# Altium PCB PW_TPS6213x_TestDemo.PcbDoc
Units mil, origin at the board's own origin, x right, y up, seen from the top; angles counter-clockwise.
Board outline 1968.5 x 1968.5 mil, 2 copper layers (Top Layer, Bottom Layer); 52 components, 24 nets, 157 pads, 297 vias.
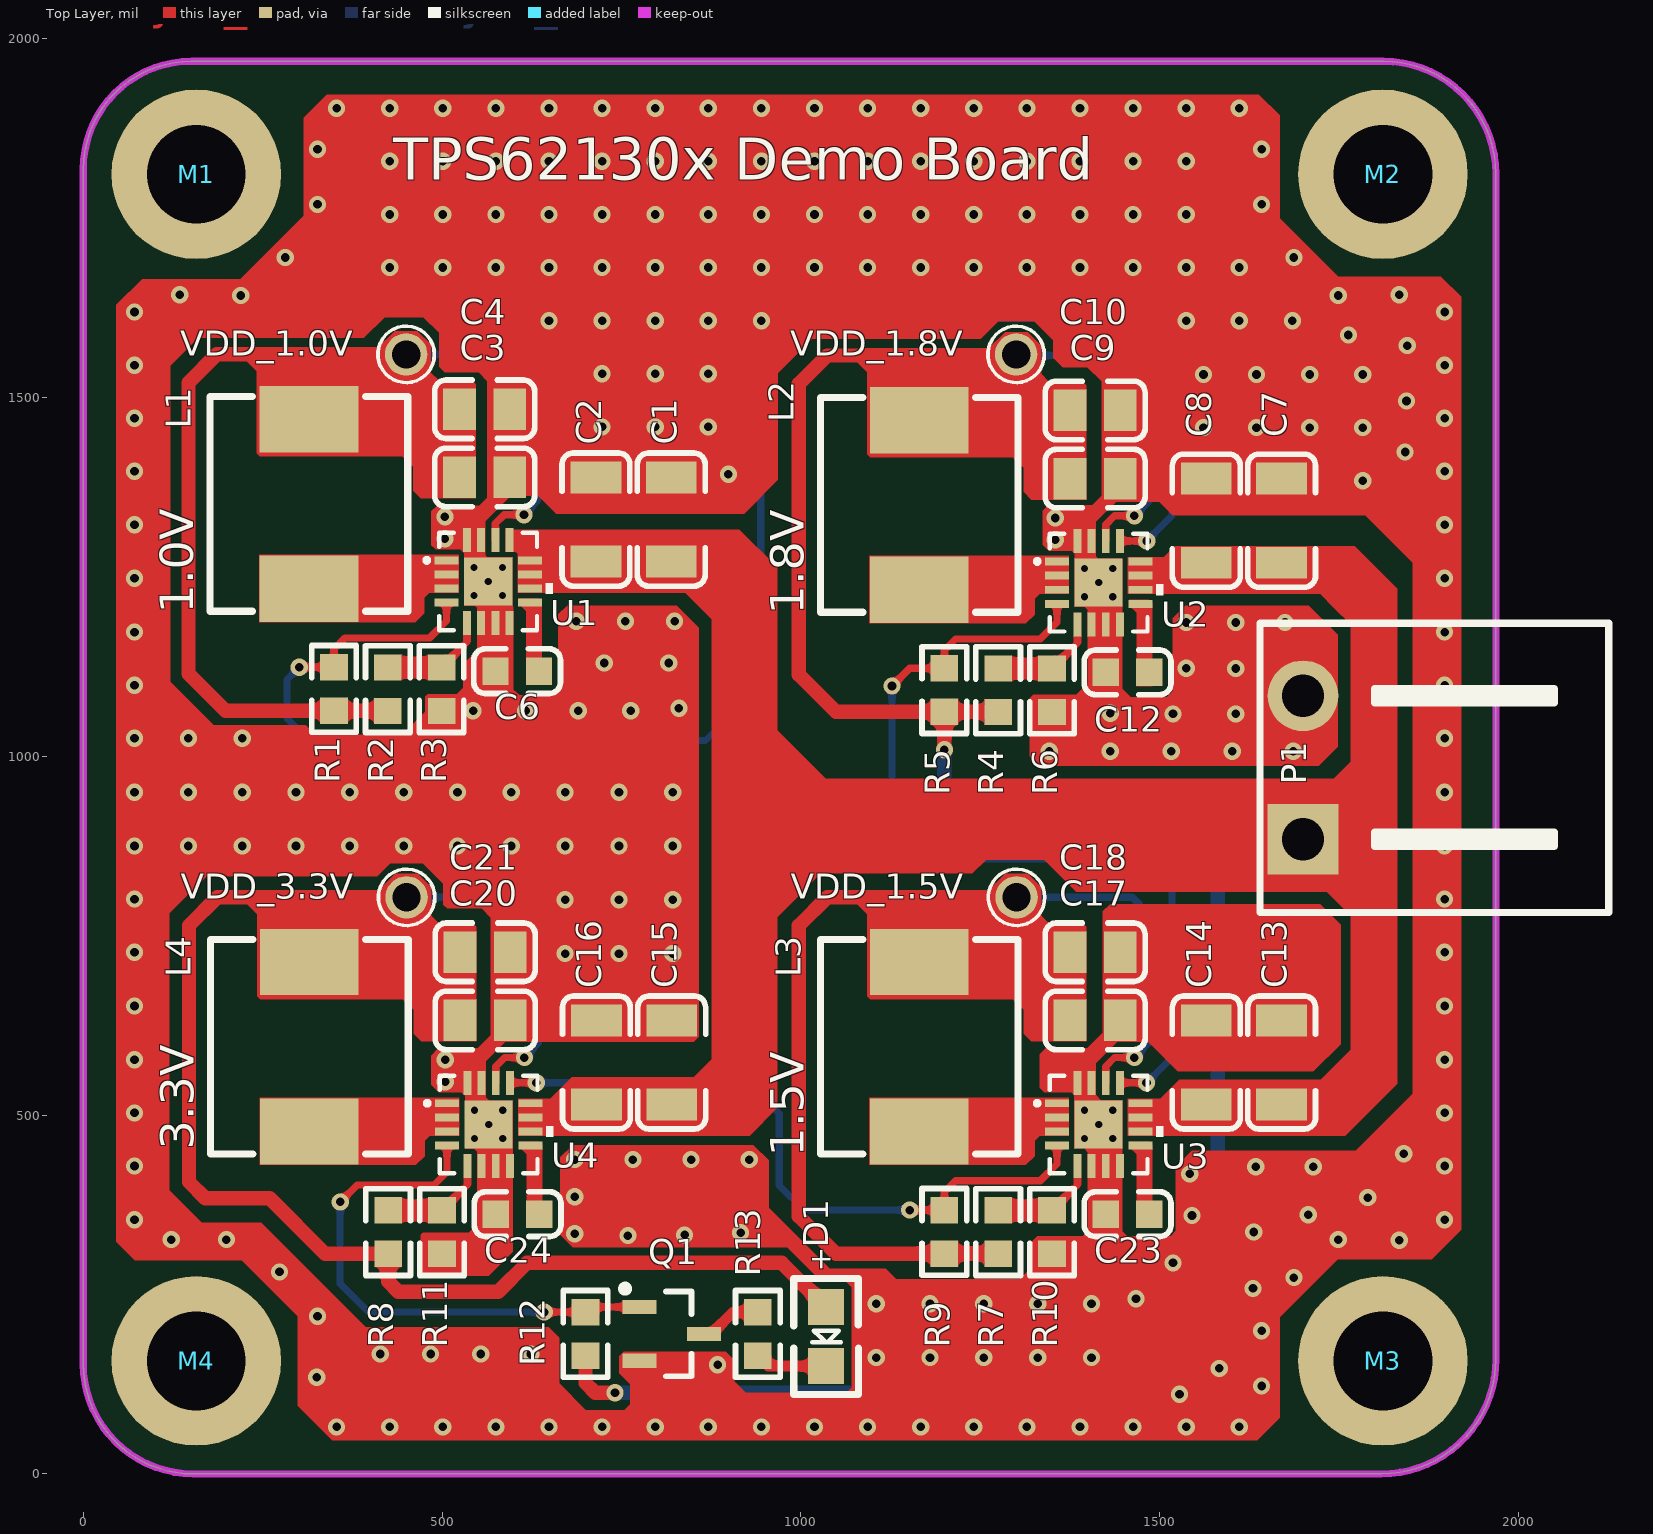
[diagram p0: Top Layer view]
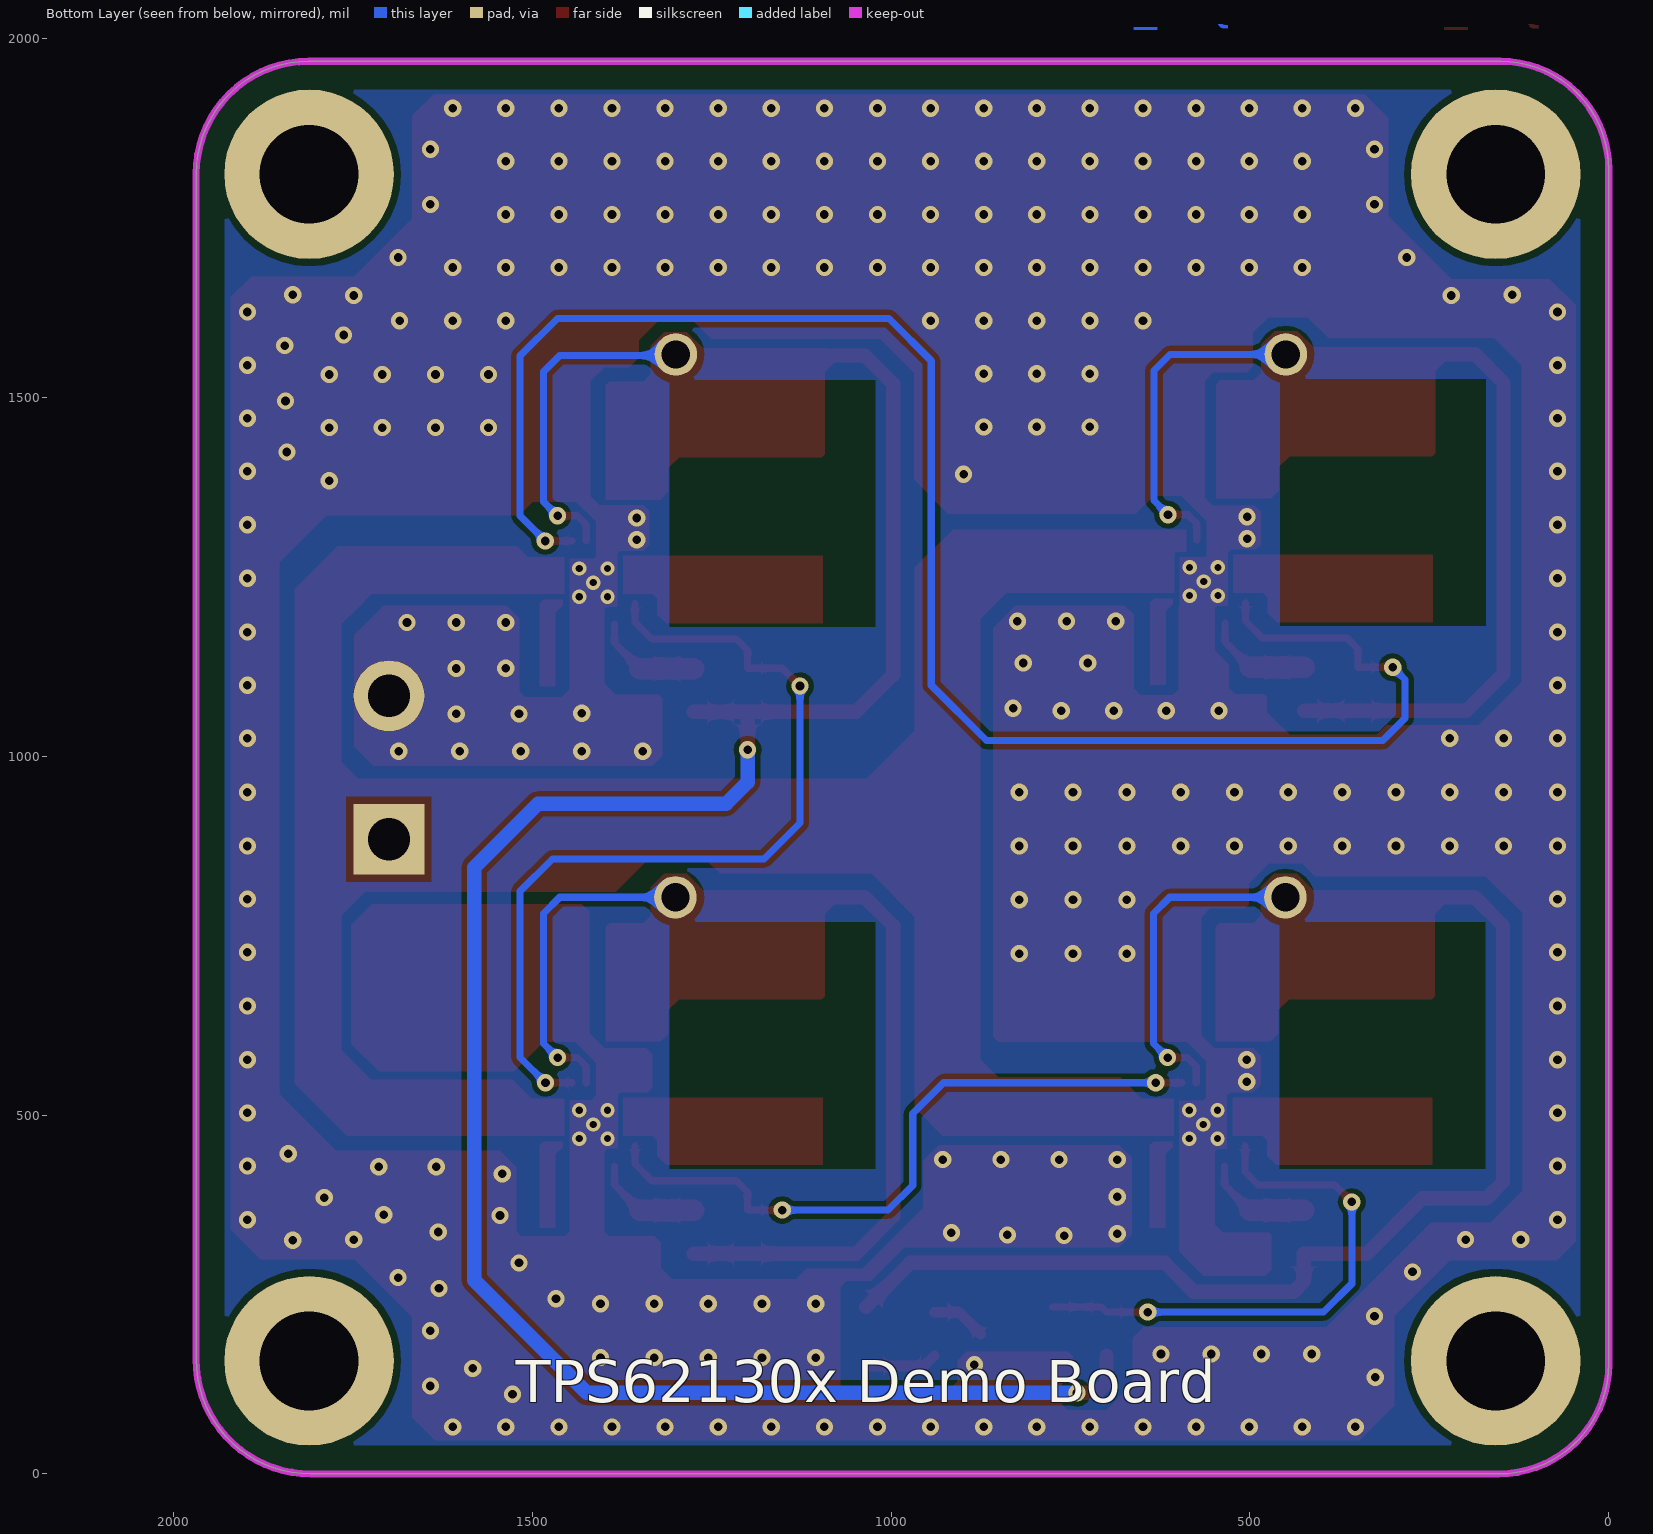
[diagram p1: Bottom Layer view, seen from below]

## Layer stack, top to bottom
Top Solder: solder mask 0.4, Solder Resist, Dk 3.5
Top Layer: signal copper 1.4
Dielectric 1: dielectric 12.6, FR-4, Dk 4.8
Bottom Layer: signal copper 1.4
Bottom Solder: solder mask 0.4, Solder Resist, Dk 3.5

## Board outline
0,153.25 0,1817.71 cw(c150.8,1817.71) 150.8,1968.5 1811.53,1968.5 cw(c1811.53,1811.53) 1968.5,1811.53 1968.5,159.57 cw(c1808.93,159.57) 1808.93,0 153.25,0 cw(c153.25,153.25)

## Design rules (kind name [scope] priority, off if disabled: settings)
BoardOutlineClearance [InNet('GND')] p1: gap=39.37 ignorepadtopadclearanceinfootprint=FALSE
Clearance [All] p1: gap=10 ignorepadtopadclearanceinfootprint=TRUE except(0: Arc-Hole Track-Hole SMDPad-Hole THPad-Hole Via-Hole Fill-Hole Poly-Hole Region-Hole Text-Hole; 6: SMDPad-Fill SMDPad-Poly SMDPad-Region; 7: Arc-SMDPad Track-SMDPad Track-Poly Track-Region Via-Poly Via-Region Poly-Poly Poly-Region Region-Region)
HoleSize [All] p1: absolutevalues=TRUE maxlimit=1000 minlimit=1 maxpercent=80.000 minpercent=20.000
MinimumSolderMaskSliver [All] p1: minsoldermaskwidth=1
PlaneConnect [All] p1: planeconnectstyle=Direct reliefexpansion=20 reliefentries=4 reliefconductorwidth=10 reliefairgap=10
PolygonConnect [InNet('No Net')] p1: connectstyle=Direct reliefconductorwidth=10 reliefentries=4 polygonreliefangle="90 Angle" airgapwidth=10
RoutingVias [All] p1: holewidth=12 width=24 viastyle="Through Hole" minholewidth=10 minwidth=20 maxholewidth=28 maxwidth=50
SilkToSilkClearance [All] p1: silktosilkclearance=0
SilkToSolderMaskClearance [IsPad] p1: minsilkscreentomaskgap=1 clearancetoexposedcopper=TRUE
SolderMaskExpansion [All] p1: expansion=4 istentingtop=FALSE
UnRoutedNet [All] p1: checkbadconnections=TRUE
Width [All] p1: maxlimit=500 minlimit=6 preferedwidth=10
24 further rules are at their usual default settings.

## Classes and differential pairs
component class "Room Definition 2": C7 C8 C9 C10 C12 L2 M6 R4 R5 R6 U2
component class "Room Definition 1": C1 C2 C3 C4 C6 L1 M5 R1 R2 R3 U1

## Components (designator, comment, footprint, x,y, rotation, side; value= is the part's Value field where it differs from the comment)
C1 "C_B2_10uF_50V_C1206_20%" C1206 819.37,1329.84 r270 top value=10uF/50V
C2 "C_B2_10uF_50V_C1206_20%" C1206 714.37,1329.84 r270 top value=10uF/50V
C3 "C_B2_22uF_10V_C0805_20%" C0805 559.37,1388.5 r180 top value=22uF/10V
C4 "C_B2_22uF_10V_C0805_20%" C0805 559.37,1483.5 r180 top value=22uF/10V
C6 "C_B2_3.3nF_50V_C0603_10%" C0603 604.69,1118.5 r0 top value=3.3nF/50V
C7 "C_B2_10uF_50V_C1206_20%" C1206 1670,1328.27 r270 top value=10uF/50V
C8 "C_B2_10uF_50V_C1206_20%" C1206 1565,1328.27 r270 top value=10uF/50V
C9 "C_B2_22uF_10V_C0805_20%" C0805 1410,1386.93 r180 top value=22uF/10V
C10 "C_B2_22uF_10V_C0805_20%" C0805 1410,1481.93 r180 top value=22uF/10V
C12 "C_B2_3.3nF_50V_C0603_10%" C0603 1455.32,1116.93 r0 top value=3.3nF/50V
C13 "C_B2_10uF_50V_C1206_20%" C1206 1670,573.27 r270 top value=10uF/50V
C14 "C_B2_10uF_50V_C1206_20%" C1206 1565,573.27 r270 top value=10uF/50V
C15 "C_B2_10uF_50V_C1206_20%" C1206 820,573.27 r270 top value=10uF/50V
C16 "C_B2_10uF_50V_C1206_20%" C1206 715,573.27 r270 top value=10uF/50V
C17 "C_B2_22uF_10V_C0805_20%" C0805 1410,631.93 r180 top value=22uF/10V
C18 "C_B2_22uF_10V_C0805_20%" C0805 1410,726.93 r180 top value=22uF/10V
C20 "C_B2_22uF_10V_C0805_20%" C0805 560,631.93 r180 top value=22uF/10V
C21 "C_B2_22uF_10V_C0805_20%" C0805 560,726.93 r180 top value=22uF/10V
C23 "C_B2_3.3nF_50V_C0603_10%" C0603 1455.32,361.93 r0 top value=3.3nF/50V
C24 "C_B2_3.3nF_50V_C0603_10%" C0603 605.32,361.93 r0 top value=3.3nF/50V
D1 "D_D2_LED-BLUE_LED0805" LED0805 1035,232.48 r270 top value=BLUE
L1 "L_C2_2.2uH_10A_MWSA0603S_20%_(MWSA0603S-2R2MT)" L_MWSA0603S 314.37,1351.77 r90 top value=2.2uH/10A
L2 "L_C2_2.2uH_10A_MWSA0603S_20%_(MWSA0603S-2R2MT)" L_MWSA0603S 1165,1350.2 r90 top value=2.2uH/10A
L3 "L_C2_2.2uH_10A_MWSA0603S_20%_(MWSA0603S-2R2MT)" L_MWSA0603S 1165,595.2 r90 top value=2.2uH/10A
L4 "L_C2_2.2uH_10A_MWSA0603S_20%_(MWSA0603S-2R2MT)" L_MWSA0603S 315,595.2 r90 top value=2.2uH/10A
M1 "M_HOLE-3.00mm" "M3 3.5x6mm" 157.48,1811.02 r0 top locked value=HOLE-3.00mm
M2 "M_HOLE-3.00mm" "M3 3.5x6mm" 1811.02,1811.02 r0 top locked value=HOLE-3.00mm
M3 "M_HOLE-3.00mm" "M3 3.5x6mm" 1811.02,157.48 r0 top value=HOLE-3.00mm
M4 "M_HOLE-3.00mm" "M3 3.5x6mm" 157.48,157.48 r0 top value=HOLE-3.00mm
P1 "P_EDG_1X2H_5.08_M" KF2EDGK5.08-2P_H 1699.8,884.25 r90 top value=EDG_1X2H_5.08_M
Q1 "Q_B2_SI2302_SOT23-3N" SOT23-3N 820,195.08 r270 top value=SI2302
R1 "R_B2_10K_1/10W_R0603_1%" R0603 349.37,1093.82 r270 top value=10K
R2 "R_B2_3K01_1/10W_R0603_1%" R0603 424.37,1093.5 r270 top value=3K01
R3 "R_B2_12K_1/10W_R0603_1%" R0603 499.37,1093.5 r90 top value=12K
R4 "R_B2_3K01_1/10W_R0603_1%" R0603 1275,1091.93 r270 top value=3K01
R5 "R_B2_10K_1/10W_R0603_1%" R0603 1200,1092.24 r270 top value=10K
R6 "R_B2_2K4_1/10W_R0603_1%" R0603 1350,1091.93 r90 top value=2K4
R7 "R_B2_2K4_1/10W_R0603_1%" R0603 1275,336.93 r270 top value=2K4
R8 "R_B2_7K5_1/10W_R0603_1%" R0603 425,336.93 r270 top value=7K5
R9 "R_B2_10K_1/10W_R0603_1%" R0603 1200,337.24 r270 top value=10K
R10 "R_B2_2K7_1/10W_R0603_1%" R0603 1350,336.93 r90 top value=2K7
R11 "R_B2_2K4_1/10W_R0603_1%" R0603 500,336.93 r90 top value=2K4
R12 "R_B2_10K_1/10W_R0603_1%" R0603 700,195.08 r90 top value=10K
R13 "R_B2_1K_1/10W_R0603_1%" R0603 940,195.08 r270 top value=1K
U1 "U_TPS62130RGTT_QFN16" QFN16-3X3-EP 564.37,1243.5 r0 top value=TPS62130RGTT
U2 "U_TPS62130RGTT_QFN16" QFN16-3X3-EP 1415,1241.93 r0 top value=TPS62130RGTT
U3 "U_TPS62130RGTT_QFN16" QFN16-3X3-EP 1415,486.93 r0 top value=TPS62130RGTT
U4 "U_TPS62130RGTT_QFN16" QFN16-3X3-EP 565,486.93 r0 top value=TPS62130RGTT
VDD_1.0V "M_TP_HOLE" TP-HOLE 450,1560 r90 top value=Testpoint (schematic designator M5)
VDD_1.5V "M_TP_HOLE" TP-HOLE 1300.63,803.43 r90 top value=Testpoint (schematic designator M7)
VDD_1.8V "M_TP_HOLE" TP-HOLE 1300,1560 r90 top value=Testpoint (schematic designator M6)
VDD_3.3V "M_TP_HOLE" TP-HOLE 450.63,803.43 r90 top value=Testpoint (schematic designator M8)

## Footprints (in the part's own frame and the unit in brackets; to place one, negate y for a bottom-side part, rotate by r counter-clockwise, add the part's x,y. Pads: shape width x height; smd on the part's side, far side on the other; paste and mask are expansions set on the pad)
C0603 [mm]
  rect 0.93x0.98 smd: 1(-0.77,0) 2(0.77,0)
  silkscreen extent -1.53,-0.79 1.54,0.79, body extent -0.8,-0.4 0.8,0.4, height 0.3
C0805 [mm]
  rect 1.16x1.47 smd: 1(-0.89,0) 2(0.89,0)
  silkscreen extent -1.77,-1.04 1.77,1.04, body extent -1,-0.62 1,0.63, height 0.77
C1206 [mm]
  rect 1.13x1.8 smd: 1(-1.49,0) 2(1.49,0)
  silkscreen extent -2.36,-1.2 2.35,1.2, body extent -1.6,-0.81 1.6,0.79, height 1
KF2EDGK5.08-2P_H [mm]
  rect 2.5x2.5 hole 1.5: 1(0,0)
  round 2.5 hole 1.5: 2(5.08,0)
  silkscreen extent -2.59,-10.82 7.65,1.52, body extent -2.54,-10.8 7.62,0.5, height 8.5
L_MWSA0603S [mm]
  rect 2.35x3.5 smd: 1(-3,0) 2(3,0)
  silkscreen extent -3.8,-3.5 3.8,3.5, body extent -3.6,-3.3 3.6,3.3, height 2.8
LED0805 [mil] "1/8W"
  rect 50x50 smd: 1(0,0) 2(82.3,0.2)
  silkscreen extent -40,-45 122,45, body extent 2,-25 80,25, height 20
"M3 3.5x6mm" [mm] "M3螺丝孔，孔3.5mm，焊盘6mm"
  round 6 hole 3.5: 0(0,0)
QFN16-3X3-EP [mm]
  rect 0.85x0.28 smd paste-0.01 mask+0.07: 1(-1.475,0.75) 2(-1.475,0.25) 3(-1.475,-0.25) 4(-1.475,-0.75) 9(1.475,-0.75) 10(1.475,-0.25) 11(1.475,0.25) 12(1.475,0.75)
  rect 0.28x0.85 smd paste-0.01 mask+0.07: 5(-0.75,-1.475) 6(-0.25,-1.475) 7(0.25,-1.475) 8(0.75,-1.475) 13(0.75,1.475) 14(0.25,1.475) 15(-0.25,1.475) 16(-0.75,1.475)
  rect 1.7x1.7 smd paste-0.01 mask+0.07: 17(0,0)
  silkscreen extent -2.24,-1.73 2.29,1.73, body extent -1.63,-1.63 1.63,1.63, height 1
R0603 [mm]
  rect 0.93x0.98 smd: 1(-0.77,0) 2(0.77,0)
  silkscreen extent -1.53,-0.79 1.54,0.79, body extent -0.85,-0.4 0.85,0.4, height 0.56
SOT23-3N [mm]
  rect 0.5x1.2 smd: 1(-0.95,-1.143) 2(0.95,-1.143) 3(0,1.143)
  silkscreen extent -1.72,-1.78 1.5,0.7, body extent -1.5,-1.2 1.5,1.2, height 1.05
TP-HOLE [mm]
  round 1.5 hole 1: 1(0,0)
  silkscreen extent -1,-1 1,1

## Part data
C3 C4 C9 C10 C17 C18 C20 C21: "X5R", ERP=01.02.02.037
P1: "Bend foot 5.08EDG", ERP=01.10.199C
Q1: "N-channel FET", ERP=01.05.01.173
U1 U2 U3 U4: "TPS6213x 3-V to17-V, 3-A Step-Down Converter In 3-mm × 3-mm QFN Package"
C1 C2 C7 C8 C13 C14 C15 C16: ERP=01.02.03.005
D1: ERP=01.09.002
L1 L2 L3 L4: ERP=01.03.050
M1 M2 M3 M4 VDD_1.0V VDD_1.5V VDD_1.8V VDD_3.3V: Note=NC
R1 R5 R9 R12: ERP=01.01.02.030
R2 R4: ERP=01.01.02.083
R3: ERP=01.01.02.081
R6 R7 R11: ERP=01.01.02.086
R8: ERP=01.01.02.085
R10: ERP=01.01.02.093
R13: ERP=01.01.02.040

## Via types
v1: diameter 24, hole 12, Top Layer to Bottom Layer, tented both sides, 277 vias
v2: diameter 20, hole 10, Top Layer to Bottom Layer, tented both sides, 20 vias

## Nets (pads, with @x,y where several pads share a name; then routed paths per layer and width w, separated by ;. In a path a pad name is that pad's centre, name@x,y a point inside that pad or via, vN(x,y) a via of type N, cw(c..) or ccw(c..) an arc to the next point about the centre after c; other vN are vias at no path point)
GND: C1.1 C2.1 C3.1 C4.1 C6.1 C7.1 C8.1 C9.1 C10.1 C12.1 C13.1 C14.1 C15.1 C16.1 C17.1 C18.1 C20.1 C21.1 C23.1 C24.1 P1.2 Q1.2 R3.1 R6.1 R10.1 R11.1 U1.6 U1.7 U1.8 U1.15 U1.16 U1.17 U2.6 U2.7 U2.8 U2.15 U2.16 U2.17 U3.6 U3.7 U3.8 U3.15 U3.16 U3.17 U4.6 U4.7 U4.8 U4.15 U4.16 U4.17
  other v1: 353,65.5 427,65.5 501,65.5 575,65.5 649,65.5 723,65.5 797,65.5 871,65.5 945,65.5 1019,65.5 1093,65.5 1167,65.5 1241,65.5 1315,65.5 1389,65.5 1463,65.5 1537,65.5 1611,65.5 1527.56,111 1642,122.5 325.5,134.5 1583,147 884,152 1105,162 1180,162 1255,162 1330,162 1405,162 414,167 484,167 554,167 624,167 1642,199.5 326.5,219.5 1105,237 1180,237 1255,237 1330,237 1405,237 1467,244 1630,258.5 1687,273.5 273.5,281.5 1518.5,294 1834,325.5 122.5,326.5 199.5,326.5 1749,326.5 759,332 838,333 685,334.5 916,336 1631,337 71.5,354 1897,354 1545,360 1707,361 1790,385 685,386.25 1542,418 1634,428 1714,428 71.5,429 1897,429 685,438 766,438 847,438 928,438 1840,446 71.5,503 1897,503 504.57,546.57 71.5,577 1897,577 504.57,577.09 71.5,652 1897,652 671.5,725 746.5,725 821.5,725 71.5,727 1897,727 671.5,800 746.5,800 821.5,800 71.5,801 1897,801 71.5,875 146.5,875 221.5,875 296.5,875 371.5,875 446.5,875 521.5,875 596.5,875 671.5,875 746.5,875 821.5,875 1897,875 71.5,950 146.5,950 221.5,950 296.5,950 371.5,950 446.5,950 521.5,950 596.5,950 671.5,950 746.5,950 821.5,950 1897,950 1346,1007 1431,1007 1516,1007 1601,1007 1686,1007 71.5,1025 146.5,1025 221.5,1025 1897,1025 1518.57,1059 1606.13,1059 1431,1060 543.31,1063.5 616.54,1063.5 689.77,1063.5 763,1063.5 830,1067 71.5,1099 1897,1099 1537,1122.71 1606.13,1122.21 726,1130 816,1130 71.5,1173 1897,1173 1537,1186.43 1606.13,1186.43 1674.63,1186.43 687,1188 755.5,1188 824,1188 71.5,1248 1897,1248 1354.57,1301.57 503.94,1303.15 71.5,1322.5 1897,1322.5 1354.57,1332.09 503.94,1333.66 1783,1384 899,1393 71.5,1397 1897,1397 1842,1424 1561,1458 1635,1458 1709,1458 1783,1458 723,1459 797,1459 871,1459 71.5,1471 1897,1471 1844,1495 1561,1532 1635,1532 1709,1532 1783,1532 723,1533 797,1533 871,1533 71.5,1545 1897,1545 1845,1572.24 1763,1587 649,1607 723,1607 797,1607 871,1607 945,1607 1537,1607 1611,1607 1685,1607 71.5,1619 1897,1619 219.5,1642 1749,1642 134.5,1643 1834,1643 427,1681 501,1681 575,1681 649,1681 723,1681 797,1681 871,1681 945,1681 1019,1681 1093,1681 1167,1681 1241,1681 1315,1681 1389,1681 1463,1681 1537,1681 1611,1681 281.5,1695 1687,1695 427,1755 501,1755 575,1755 649,1755 723,1755 797,1755 871,1755 945,1755 1019,1755 1093,1755 1167,1755 1241,1755 1315,1755 1389,1755 1463,1755 1537,1755 326.5,1769 1642,1769 427,1829 501,1829 575,1829 649,1829 723,1829 797,1829 871,1829 945,1829 1019,1829 1093,1829 1167,1829 1241,1829 1315,1829 1389,1829 1463,1829 1537,1829 326.5,1846 1642,1846 353,1903 427,1903 501,1903 575,1903 649,1903 723,1903 797,1903 871,1903 945,1903 1019,1903 1093,1903 1167,1903 1241,1903 1315,1903 1389,1903 1463,1903 1537,1903 1611,1903
  other v2: 545.31,467.24 584.68,467.24 1395.31,467.24 1434.68,467.24 565,486.93 1415,486.93 545.31,506.61 584.68,506.61 1395.31,506.61 1434.68,506.61 1395.31,1222.24 1434.68,1222.24 544.69,1223.82 584.06,1223.82 1415,1241.93 564.37,1243.5 1395.31,1261.61 1434.68,1261.61 544.69,1263.19 584.06,1263.19
NetC6_2: C6.2 U1.9
NetC12_2: C12.2 U2.9
NetC23_2: C23.2 U3.9
NetC24_2: C24.2 U4.9
NetD1_2: D1.2 R13.2 | length 101.2
  Top Layer w15: R13.2 954.58,150.18 D1.2
NetL1_1: L1.1 U1.1 U1.2 U1.3
NetL2_1: L2.1 U2.1 U2.2 U2.3
NetL3_1: L3.1 U3.1 U3.2 U3.3
NetL4_1: L4.1 U4.1 U4.2 U4.3
NetQ1_3: Q1.3 R13.1 | length 77.5
  Top Layer w15: Q1.3@875.08,195.08 905.39,225.39 R13.1
NetR2_1: R2.1 R3.2 U1.5 | length 151.3
  Top Layer w10: R3.2 534.84,1159.28 U1.5
  Top Layer w30: R2.1 R3.2
NetR4_1: R4.1 R6.2 U2.5 | length 151.3
  Top Layer w10: R6.2 1385.46,1157.71 U2.5
  Top Layer w30: R4.1 R6.2
NetR7_1: R7.1 R10.2 U3.5 | length 151.3
  Top Layer w10: R10.2 1385.46,402.71 U3.5
  Top Layer w30: R7.1 R10.2
NetR8_1: R8.1 R11.2 U4.5 | length 151.3
  Top Layer w10: R11.2 535.46,402.71 U4.5
  Top Layer w30: R8.1 R11.2
PW_GOOD: Q1.1 R12.2 U4.4 | length 757.7
  Top Layer w10: v1(358,379) 381.71,402.71 488.71,402.71 506.93,420.93 U4.4 ; v1(642.39,225.39) R12.2 707.09,232.48 Q1.1
  Bottom Layer w10: v1(358,379) 358,265 397.61,225.39 v1(642.39,225.39) ; v1@642.39,222 v1@647,222
VDD1V0_PG: R1.1 U1.4 U2.13 | length 2435.8
  Top Layer w10: v1(301.13,1124.13) R1.1 349.37,1149.37 365,1165 483,1165 506.3,1188.3 U1.4 ; U2.13@1444.85,1300 v1(1482,1300)
  Bottom Layer w10: v1(301.13,1124.13) 284,1107 284,1053 315,1022 867,1022 944,1099 944,1551 1003,1610 1465,1610 1517,1558 1517,1335 v1(1482,1300)
VDD1V5_PG: R9.1 U3.4 U4.13 | length 961.2
  Top Layer w10: U4.13@594.85,545 v1(631.34,545) ; v1(1151.76,367.56) R9.1 1200,392.8 1215.63,408.43 1333.63,408.43 1356.93,431.72 U3.4
  Bottom Layer w10: v1(631.34,545) 927,545 970,502 970,402 1004.44,367.56 v1(1151.76,367.56)
VDD1V8_PG: R5.1 U2.4 U3.13 | length 1245.8
  Top Layer w10: v1(1127,1097.83) 1151.72,1122.56 R5.1 1200,1147.8 1215.63,1163.43 1333.63,1163.43 1356.93,1186.72 U2.4 ; U3.13@1444.85,545 v1(1481.67,545)
  Bottom Layer w10: v1(1127,1097.83) 1127,907 1177,857 1472,857 1517,812 1517,580.33 v1(1481.67,545)
VDD_+1V0: C3.2 C4.2 L1.2 R1.2 R2.2 U1.14 VDD_1.0V.1 | length 1494.3
  Top Layer w10: U1.14 574.22,1324.22 586.61,1336.61 v1(614.17,1336.61)
  Top Layer w20: R2.2 424.05,1063.5 R1.2 198.31,1063.5 146.65,1115.16 146.65,1520.67 185.98,1560 VDD_1.0V.1
  Bottom Layer w10: VDD_1.0V.1 611.26,1560 633.86,1537.4 633.86,1356.3 v1(614.17,1336.61)
VDD_+1V5: C17.2 C18.2 L3.2 R7.2 R9.2 U3.14 VDD_1.5V.1 | length 1494.3
  Top Layer w10: U3.14 1424.85,567.65 1437.24,580.04 v1(1464.8,580.04)
  Top Layer w20: R7.2 1274.68,306.93 R9.2 1048.94,306.93 997.28,358.58 997.28,764.09 1036.61,803.43 VDD_1.5V.1
  Bottom Layer w10: VDD_1.5V.1 1461.89,803.43 1484.49,780.83 1484.49,599.72 v1(1464.8,580.04)
VDD_+1V8: C9.2 C10.2 L2.2 R4.2 R5.2 R12.1 U2.14 VDD_1.8V.1 | length 3587.3
  Top Layer w10: U2.14 1424.85,1322.65 1437.24,1335.04 v1(1464.8,1335.04)
  Top Layer w20: R12.1 700,126.58 713.58,113 v1(741,113) ; v1(1200,1009) R5.2 ; R4.2 1274.68,1061.93 R5.2 ; VDD_1.8V.1@1300.63,1558.43 1036.61,1558.43 997.28,1519.09 997.28,1113.58 1048.94,1061.93 R5.2
  Bottom Layer w10: VDD_1.8V.1@1300.63,1558.43 1461.89,1558.43 1484.49,1535.83 1484.49,1354.72 v1(1464.8,1335.04)
  Bottom Layer w20: v1(741,113) 1424,113 1581,270 1581,845 1492,934 1230,934 1200,964 v1(1200,1009)
VDD_+3V3: C20.2 C21.2 D1.1 L4.2 R8.2 U4.14 VDD_3.3V.1 | length 2162.6
  Top Layer w10: U4.14 574.85,567.65 587.24,580.04 v1(614.8,580.04)
  Top Layer w20: VDD_3.3V.1 186.61,803.43 147.28,764.09 147.28,406.72 170,384 259.93,384 337,306.93 424.68,306.93 R8.2 425,268 439,254 578.41,254 618.41,294 973.48,294 D1.1
  Bottom Layer w10: VDD_3.3V.1 611.89,803.43 634.49,780.83 634.49,599.72 v1(614.8,580.04)
VDD_+5V: C1.2 C2.2 C7.2 C8.2 C13.2 C14.2 C15.2 C16.2 P1.1 U1.10 U1.11 U1.12 U1.13 U2.10 U2.11 U2.12 U3.10 U3.11 U3.12 U4.10 U4.11 U4.12
pads on no net: M1.0 M2.0 M3.0 M4.0

## Polygon pours and split planes (outlines as drawn)
GND on Bottom Layer "Bottom Layer-GND" (solid, remove dead copper, pour order 6): 153.25,0 0,153.25 0,1817.71 150.8,1968.5 1811.53,1968.5 1968.5,1811.53 1968.5,159.57 1808.93,0

## Keep-outs
Keep-Out Layer:
  the board outline again, w10

## Other copper
Top Layer:
  region net GND: 46,367 46,323.5 71.5,298 221,298 299,220 320,220 349,249 248,350 165,350 113,402 113,404
  region net GND: 46,1060 104,1118 117,1118 117,1108 182,1043 310,1043 324,1029 324,1011 302,989 54,989 46,997
  pour cut-out: 171.89,769.02 458.31,769.02 458.31,425.51 171.89,425.51
  pour cut-out: 1021.89,769.02 1308.31,769.02 1308.31,425.51 1021.89,425.51
  region net VDD_+5V: 1383.67,811.33 1339,856 1258,856 1239,837 1028,837 967,776 967,510 928.46,471.46 606.33,471.46 606.3,522.64 650.64,522.64 681,553 851,553 875.98,577.98 875.98,1190.94 838.93,1228 605.32,1228 605.32,1282.02 602.33,1285 588.58,1285 588.58,1315.97 914.4,1315.85 967,1263.25 967,1036.09 1034.59,968.5 1742.5,968.5 1766,992 1766,1184 1742.81,1207.19 1723.62,1226.38 1506.33,1226.38 1455.76,1226.38 1455.71,1277 1505.35,1277 1520.67,1292.32 1772,1292.32 1831,1233.32 1831,543.6 1758.83,471.42 1455.74,471.43 1455.71,522.64 1500.98,522.64 1527.56,549.21 1694.88,549.21 1724.21,549.21 1766,591 1766,777.87 1732.54,811.33
  region net NetC24_2: 607.91,462.91 634.49,462.91 639.41,457.99 639.41,342.83 617.76,342.83 617.76,445.2 607.91,455.04
  region net NetC23_2: 1457.91,462.91 1484.49,462.91 1489.41,457.99 1489.41,342.83 1467.76,342.83 1467.76,445.2 1457.91,455.04
  region net NetC12_2: 1457.91,1217.91 1484.49,1217.91 1489.41,1212.99 1489.41,1097.83 1467.76,1097.83 1467.76,1200.2 1457.91,1210.04
  region net VDD_+1V5: 1284.68,835.94 1262.05,813.31 1089.8,813.31 1077.99,801.5 1077.99,794.61 1092.76,779.84 1092.76,665.67 1096.69,661.73 1295.51,661.73 1310.28,646.97 1310.28,613.5 1321.1,602.68 1397.87,602.68 1397.87,762.13 1392.95,767.05 1345.71,767.05 1334.88,777.87 1334.88,817.24 1316.18,835.94
  region net VDD_+3V3: 434.68,835.94 412.05,813.31 239.8,813.31 227.99,801.5 227.99,794.61 242.76,779.84 242.76,665.67 246.69,661.73 445.51,661.73 460.28,646.97 460.28,613.5 471.1,602.68 547.87,602.68 547.87,762.13 542.95,767.05 495.71,767.05 484.88,777.87 484.88,817.24 466.18,835.94
  region net NetL4_1: 482.63,471.43 475.63,464.43 475.63,442.43 463.63,430.43 245.63,430.43 245.63,524.43 523.63,524.43 523.63,471.43
  region net NetL3_1: 1332.63,471.43 1325.63,464.43 1325.63,442.43 1313.63,430.43 1095.63,430.43 1095.63,524.43 1373.63,524.43 1373.63,471.43
  region net NetL2_1: 1332.63,1226.43 1325.63,1219.43 1325.63,1197.43 1313.63,1185.43 1095.63,1185.43 1095.63,1279.43 1373.63,1279.43 1373.63,1226.43
  pour cut-out: 1021.89,1524.02 1308.31,1524.02 1308.31,1180.51 1021.89,1180.51
  region net VDD_+1V8: 1284.68,1590.94 1262.05,1568.31 1089.8,1568.31 1077.99,1556.5 1077.99,1549.61 1092.76,1534.84 1092.76,1420.67 1096.69,1416.73 1295.51,1416.73 1310.28,1401.97 1310.28,1368.5 1321.1,1357.68 1397.87,1357.68 1397.87,1517.13 1392.95,1522.05 1345.71,1522.05 1334.88,1532.87 1334.88,1572.24 1316.18,1590.94
  region net NetC6_2: 607.28,1219.49 633.86,1219.49 638.78,1214.57 638.78,1099.41 617.13,1099.41 617.13,1201.77 607.28,1211.61
  pour cut-out: 171.26,1525.59 457.68,1525.59 457.68,1182.09 171.26,1182.09
  region net VDD_+1V0: 434.05,1592.52 411.42,1569.88 239.17,1569.88 227.36,1558.07 227.36,1551.18 242.13,1536.42 242.13,1422.24 246.06,1418.31 444.88,1418.31 459.65,1403.54 459.65,1370.08 470.47,1359.25 547.24,1359.25 547.24,1518.7 542.32,1523.62 495.08,1523.62 484.25,1534.45 484.25,1573.82 465.55,1592.52
  region net GND: 235 vertices and 0 holes, not listed, extent 46,47 1920,1922
  region net NetL1_1: 482,1228 475,1221 475,1199 463,1187 245,1187 245,1281 523,1281 523,1228
  text "'.Layer_Name'" at -19.65,2012 h80
Bottom Layer:
  pour cut-out: 1021.89,769.02 1308.31,769.02 1308.31,425.51 1021.89,425.51
  pour cut-out: 1021.89,1524.02 1308.31,1524.02 1308.31,1180.51 1021.89,1180.51
  pour cut-out: 171.26,1525.59 457.68,1525.59 457.68,1182.09 171.26,1182.09
  pour cut-out: 171.89,769.02 458.31,769.02 458.31,425.51 171.89,425.51
  text "'.Layer_Name'" at 413.35,2012 h80

## Silkscreen, mask and mechanical layers (free items; w line width, h text height)
Top Overlay:
  text "TPS62130x Demo Board" at 432,1784 h100
  text "1.0V" at 168.8,1198.44 h80 r90
  text "1.8V" at 1019.43,1196.86 h80 r90
  text "3.3V" at 169.43,451.86 h80 r90
  text "1.5V" at 1019.43,441.86 h80 r90
Bottom Overlay:
  text "TPS62130x Demo Board" at 1523,80 h100
Drill Drawing:
  circle w10: c2224.13,204.52 r27.59
  lines w10: 2196.54,314.9 2210.33,314.9 2224.13,301.1 2237.93,314.9 2251.73,314.9 2237.93,328.7 2251.73,342.5 2237.93,342.5 2224.13,356.29 2210.33,342.5 2196.54,342.5 2210.33,328.7 2196.54,314.9 ; 2196.54,480.47 2251.73,480.47 2224.13,425.28 2196.54,480.47 ; 2196.54,549.46 2224.13,563.25 2251.73,549.46 2237.93,577.05 2251.73,604.65 2224.13,590.85 2196.54,604.65 2210.33,577.05 2196.54,549.46 ; 2196.54,673.63 2251.73,673.63 2251.73,728.82 2196.54,728.82 2196.54,673.63
  lines w15: 2146.5,139.68 5678.48,139.68 ; 2146.5,760.56 5678.48,760.56 ; 2465.71,15.5 2465.71,884.73 ; 2757.74,15.5 2757.74,884.73 ; 3331.11,15.5 3331.11,884.73 ; 3578.72,15.5 3578.72,884.73 ; 3939.07,15.5 3939.07,884.73 ; 4621.11,15.5 4621.11,884.73 ; 4916.41,15.5 4916.41,884.73 ; 5302.27,15.5 5302.27,884.73 ; 2146.5,15.5 5678.48,15.5 5678.48,884.73 2146.5,884.73 2146.5,15.5
  text "Symbol" at 2221.01,797.81 h72
  text "Count" at 2502.96,797.81 h72
  text "Hole Size" at 2794.99,797.81 h72
  text "Plated" at 3368.37,797.81 h72
  text "Hole Type" at 3615.97,797.81 h72
  text "Drill Layer Pair" at 3976.33,797.81 h72
  text "Via/Pad" at 4658.36,797.81 h72
  text "Pad Shape" at 4953.66,797.81 h72
  text "Template" at 5339.52,797.81 h72
  text "20" at 2502.96,673.63 h60
  text "10.00mil (0.254mm)" at 2794.99,673.63 h60
  text "PTH" at 3368.37,673.63 h60
  text "Round" at 3615.97,673.63 h60
  text "Top Layer - Bottom Layer" at 3976.33,673.63 h60
  text "Via" at 4658.36,673.63 h60
  text "Rounded" at 4953.66,673.63 h60
  text "v51h25" at 5339.52,673.63 h60
  text "277" at 2502.96,549.46 h60
  text "12.00mil (0.305mm)" at 2794.99,549.46 h60
  text "PTH" at 3368.37,549.46 h60
  text "Round" at 3615.97,549.46 h60
  text "Top Layer - Bottom Layer" at 3976.33,549.46 h60
  text "Via" at 4658.36,549.46 h60
  text "Rounded" at 4953.66,549.46 h60
  text "v61h30" at 5339.52,549.46 h60
  text "4" at 2502.96,425.28 h60
  text "39.37mil (1.000mm)" at 2794.99,425.28 h60
  text "PTH" at 3368.37,425.28 h60
  text "Round" at 3615.97,425.28 h60
  text "Top Layer - Bottom Layer" at 3976.33,425.28 h60
  text "Pad" at 4658.36,425.28 h60
  text "Rounded" at 4953.66,425.28 h60
  text "c150h100" at 5339.52,425.28 h60
  text "2" at 2502.96,301.1 h60
  text "59.06mil (1.500mm)" at 2794.99,301.1 h60
  text "PTH" at 3368.37,301.1 h60
  text "Round" at 3615.97,301.1 h60
  text "Top Layer - Bottom Layer" at 3976.33,301.1 h60
  text "Pad" at 4658.36,301.1 h60
  text "(Mixed)" at 4953.66,301.1 h60
  text "(Mixed)" at 5339.52,301.1 h60
  text "4" at 2502.96,176.93 h60
  text "137.79mil (3.500mm)" at 2794.99,176.93 h60
  text "PTH" at 3368.37,176.93 h60
  text "Round" at 3615.97,176.93 h60
  text "Top Layer - Bottom Layer" at 3976.33,176.93 h60
  text "Pad" at 4658.36,176.93 h60
  text "Rounded" at 4953.66,176.93 h60
  text "c600h350" at 5339.52,176.93 h60
  text "307 Total" at 2502.96,52.75 h60

## Text inside footprints (layer, text, board x,y; h text height)
D1: Top Overlay "+" at 1016,281.48 h30 r270